# Altium PCB PCB1.PcbDoc (part 7 of 9)
Units mm, origin at the board's own origin, x right, y up, seen from the top; angles counter-clockwise.
Board outline 227 x 102 mm, 4 copper layers (Top Layer, MidLayer1, MidLayer2, Bottom Layer); 425 components, 426 nets, 1455 pads, 440 vias.
Unrouted connection lines stored in the file: 2.
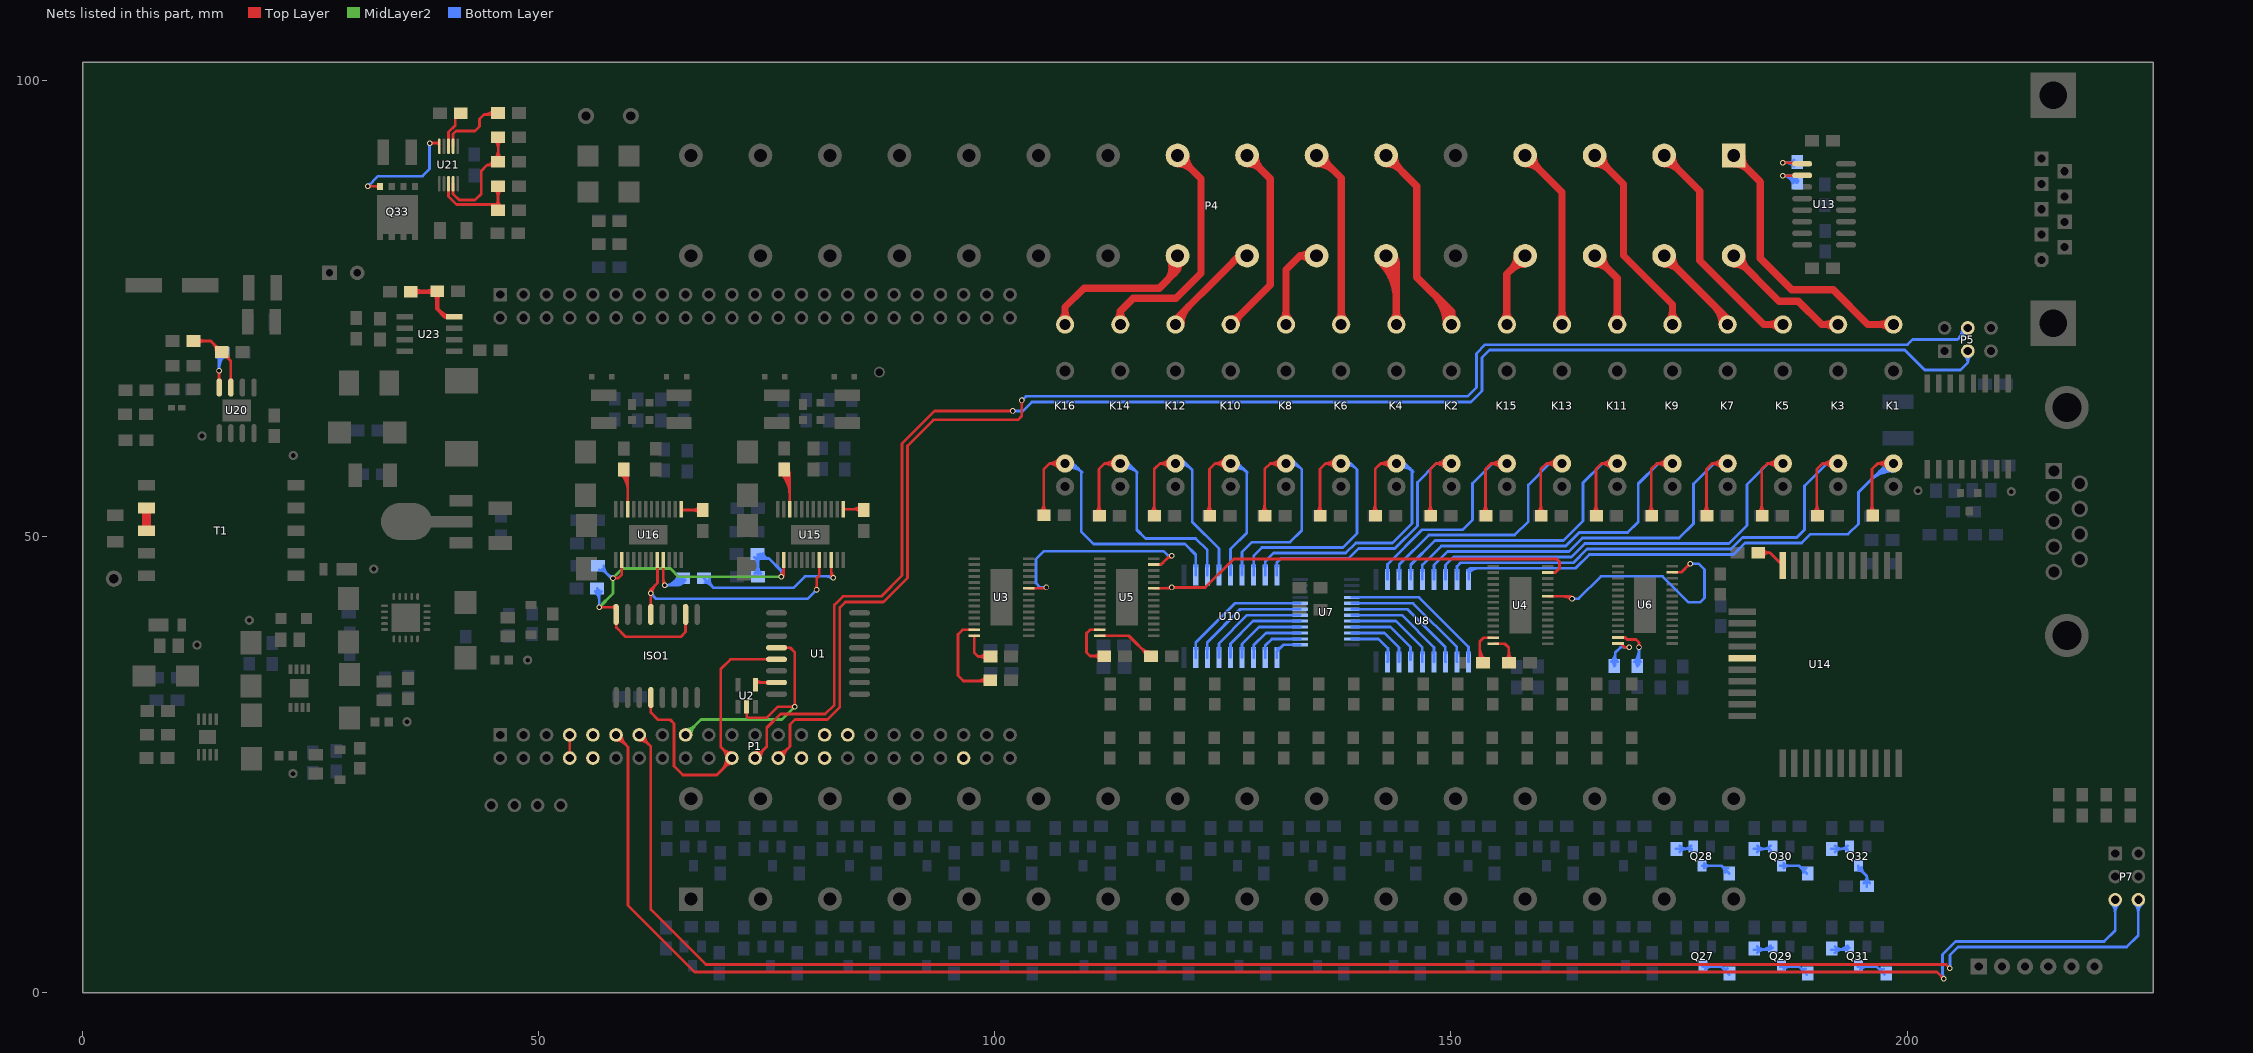
[diagram p9: the nets of this part, all layers, seen from the top]

## Via types
v1: diameter 0.6, hole 0.4, Top Layer to Bottom Layer, 427 vias
v2: diameter 0.5, hole 0.2, Top Layer to Bottom Layer, 9 vias
v3: diameter 0.66, hole 0.33, Top Layer to Bottom Layer, 4 vias

## Nets (pads, with @x,y where several pads share a name; then routed paths per layer and width w, separated by ;. In a path a pad name is that pad's centre, name@x,y a point inside that pad or via, vN(x,y) a via of type N, cw(c..) or ccw(c..) an arc to the next point about the centre after c; other vN are vias at no path point) (continued)
NetQ27_3: Q27.3 R99.1 | length 5.6
  Bottom Layer w0.3: Q27.3@177.571,2.897 179.634,2.897 R99.1@180.491,2.04 ; Q27.3@177.857,2.589 cw(c178.6,1.847) 178.6,2.897 ; Q27.3@177.857,3.084 ccw(c178.31,3.537) 178.31,2.897 ; 179.762,2.769 ccw(c180.089,3.096) R99.1@180.304,2.686 ; 179.883,2.647 cw(c179.493,2.257) R99.1@180.045,2.257
NetQ28_1: Q28.1 R92.2 | length 4.9
  Bottom Layer w0.3: R92.2@174.671,15.804 Q28.1@176.389,15.804 ; R92.2@175.066,15.461 cw(c175.894,14.633) 175.894,15.804 cw(c175.894,16.975) R92.2@175.066,16.147 ; 175.491,15.804 ccw(c175.491,16.966) Q28.1@176.313,16.144 ; 175.939,15.804 cw(c175.939,15.276) Q28.1@176.313,15.649
NetQ28_3: Q28.3 R100.1 | length 6
  Bottom Layer w0.3: Q28.3@177.581,13.947 179.645,13.947 R100.1@180.501,13.09 ; Q28.3@177.757,13.699 cw(c178.355,13.102) 178.355,13.947 cw(c178.355,14.792) Q28.3@177.757,14.194 ; 179.712,13.879 ccw(c180.223,14.39) R100.1@180.395,13.688 ; 179.778,13.813 cw(c179.182,13.217) R100.1@180.025,13.217
NetQ29_1: Q29.1 R93.2 | length 5.3
  Bottom Layer w0.3: R93.2@183.175,4.754 Q29.1@184.893,4.754 ; R93.2@183.574,4.404 cw(c184.418,3.559) 184.418,4.754 ; R93.2@183.574,5.09 ccw(c184.385,5.901) 184.385,4.754 ; 183.984,4.754 ccw(c183.984,6.223) Q29.1@185.023,5.184 ; 184.708,4.754 ccw(c184.708,5.499) Q29.1@185.235,4.972
NetQ29_3: Q29.3 R101.1 | length 5.5
  Bottom Layer w0.3: Q29.3@186.085,2.897 188.149,2.897 R101.1@189.005,2.04 ; Q29.3@186.467,2.589 cw(c187.21,1.847) 187.21,2.897 ; Q29.3@186.467,3.084 ccw(c186.92,3.537) 186.92,2.897 ; 188.309,2.736 ccw(c188.625,3.051) R101.1@188.857,2.671 ; R101.1@188.51,2.536 cw(c188.231,2.257) R101.1@188.625,2.257
NetQ30_1: Q30.1 R94.2 | length 4.9
  Bottom Layer w0.3: R94.2@183.181,15.804 Q30.1@184.898,15.804 ; R94.2@183.58,15.461 cw(c184.408,14.633) 184.408,15.804 cw(c184.408,16.975) R94.2@183.58,16.147 ; 184.201,15.804 ccw(c184.201,16.966) Q30.1@185.023,16.144 ; 184.649,15.804 cw(c184.649,15.276) Q30.1@185.023,15.649
NetQ30_3: Q30.3 R102.1 | length 5.8
  Bottom Layer w0.3: Q30.3@186.091,13.947 188.154,13.947 R102.1@189.011,13.09 ; Q30.3@186.467,13.699 cw(c187.065,13.102) 187.065,13.947 cw(c187.065,14.792) Q30.3@186.467,14.194 ; 188.267,13.834 ccw(c188.736,14.303) R102.1@188.952,13.676 ; 188.442,13.659 cw(c188.001,13.217) R102.1@188.625,13.217
NetQ31_1: Q31.1 R95.2 | length 5.3
  Bottom Layer w0.3: R95.2@191.69,4.754 Q31.1@193.407,4.754 ; R95.2@192.093,4.404 cw(c192.938,3.559) 192.938,4.754 ; R95.2@192.093,5.09 ccw(c192.904,5.901) 192.904,4.754 ; 192.414,4.754 ccw(c192.414,6.223) Q31.1@193.453,5.184 ; 193.138,4.754 ccw(c193.138,5.499) Q31.1@193.665,4.972
NetQ31_3: Q31.3 R103.1 | length 5.2
  Bottom Layer w0.3: Q31.3@194.6,2.897 196.663,2.897 R103.1@197.52,2.04 ; Q31.3@194.897,2.589 cw(c195.64,1.847) 195.64,2.897 ; Q31.3@194.897,3.084 ccw(c195.35,3.537) 195.35,2.897 ; 196.872,2.688 ccw(c197.176,2.992) R103.1@197.431,2.647
NetQ32_1: Q32.1 R96.2 | length 4.9
  Bottom Layer w0.3: R96.2@191.69,15.804 Q32.1@193.407,15.804 ; R96.2@192.093,15.461 cw(c192.921,14.633) 192.921,15.804 cw(c192.921,16.975) R96.2@192.093,16.147 ; 192.631,15.804 ccw(c192.631,16.966) Q32.1@193.453,16.144 ; 193.079,15.804 cw(c193.079,15.276) Q32.1@193.453,15.649
NetQ32_3: Q32.3 R104.1 | length 5.7
  Bottom Layer w0.3: Q32.3@194.65,13.447 cw(c194.65,12.763) 195.133,13.247 ; Q32.3@194.65,13.947 194.65,13.73 195.58,12.8 ; Q32.3@195,13.797 ccw(c196.006,13.797) 195.295,13.085 ; R104.1@195.248,12.034 ccw(c194.529,12.8) 195.58,12.8 ; R104.1@195.58,11.68 195.58,12.8 ; R104.1@195.912,12.034 cw(c196.631,12.8) 195.58,12.8
NetQ33_4: Q33.4 U21.10 | length 16.1
  Top Layer w0.3: v1(31.27,88.42) 32.589,88.42 Q33.4@32.613,88.396 ; v1@31.376,88.314 cw(c31.632,88.058) 31.632,88.42 cw(c31.632,88.782) v1@31.376,88.526 ; 32.127,88.42 ccw(c32.127,88.92) Q33.4@32.48,88.566 ; 32.193,88.42 cw(c32.193,88.014) Q33.4@32.48,88.301 ; v1(38.04,93.16) 38.88,93.16 ; v1@38.146,93.054 cw(c38.402,92.798) 38.402,93.16 cw(c38.402,93.522) v1@38.146,93.266 ; U21.10@39.07,92.97 38.88,93.16 ; U21.10@39.07,93.35 38.88,93.16
  Bottom Layer w0.3: v1(31.27,88.42) 32.39,89.54 37.26,89.54 38.04,90.32 v1(38.04,93.16) ; v1@31.27,88.57 ccw(c31.27,88.932) 31.526,88.676 ccw(c31.782,88.42) v1@31.42,88.42 ; v1@37.934,93.054 cw(c37.678,92.798) 38.04,92.798 cw(c38.402,92.798) v1@38.146,93.054
NetR1_2: R1.2 U3.14 | length 5.6
  Top Layer w0.3: U3.14@97.758,39.155 97.73,39.127 97.73,37.31 98.16,36.88 R1.2@99.504,36.88 ; R1.2@99.034,36.537 ccw(c98.206,35.709) 98.206,36.88 ccw(c98.206,38.051) R1.2@99.034,37.223
NetR2_2: R2.2 U4.14 | length 5.4
  Top Layer w0.3: U4.14@154.648,38.285 155.895,38.285 156.34,37.84 156.34,36.224 R2.2@156.364,36.2 ; R2.2@156.021,36.543 ccw(c155.251,37.313) 156.34,37.313 ; 156.34,37.429 ccw(c157.593,37.429) R2.2@156.707,36.543
NetR3_2: R3.2 U3.13 | length 12.2
  Top Layer w0.3: U3.13@97.758,39.805 96.445,39.805 95.95,39.31 95.95,34.81 96.55,34.21 99.33,34.21 R3.2@99.47,34.07 ; 98.027,34.21 ccw(c98.027,35.62) R3.2@99.024,34.623 ; 98.365,34.21 cw(c98.365,33.278) R3.2@99.024,33.937
NetR4_2: R4.2 U4.13 | length 7
  Top Layer w0.3: R4.2@153.046,36.543 ccw(c152.795,36.794) R4.2@153.15,36.794 ; 153.15,37.224 ccw(c154.413,37.224) R4.2@153.52,36.331 ; 153.15,37.948 ccw(c155.137,37.948) R4.2@153.732,36.543 ; R4.2@153.516,36.2 153.15,36.566 153.15,38.55 153.535,38.935 U4.13@154.648,38.935
NetR5_2: R5.2 U5.14 | length 8.4
  Top Layer w0.3: U5.14@111.498,39.155 114.675,39.155 116.9,36.93 R5.2@117.104,36.93 ; 116.018,37.812 ccw(c116.977,38.772) R5.2@116.977,37.415 ; 116.204,37.626 cw(c115.507,36.93) R5.2@116.492,36.93
NetR6_2: R6.2 U6.14 | length 8.6
  Top Layer w0.3: U6.14@168.308,38.315 168.605,38.315 169.03,37.89 v1(169.56,37.89) ; U6.14@168.793,38.315 ccw(c169.247,38.315) 168.926,37.994 ; v1@169.454,37.784 ccw(c169.198,37.528) 169.198,37.89 ccw(c169.198,38.252) v1@169.454,37.996
  Bottom Layer w0.3: R6.2@167.568,36.317 ccw(c166.606,37.34) 168.01,37.34 ; R6.2@167.773,36.099 ccw(c167.258,36.646) 168.01,36.646 ; R6.2@167.9,35.837 168.01,35.947 168.01,37.34 ; 168.01,36.869 ccw(c168.805,36.869) R6.2@168.243,36.307 ; v1@169.454,37.784 ccw(c169.198,37.528) 169.198,37.89 ccw(c169.198,38.252) v1@169.454,37.996 ; v1(169.56,37.89) 168.56,37.89 168.01,37.34
NetR7_2: R7.2 U5.13 | length 7.7
  Top Layer w0.3: 110.648,36.94 cw(c110.648,35.701) R7.2@111.524,36.577 ; 110.744,36.94 ccw(c110.744,38.043) R7.2@111.524,37.263 ; U5.13@111.498,39.805 110.415,39.805 110.04,39.43 110.04,37.33 110.43,36.94 111.974,36.94 R7.2@111.994,36.92
NetR8_2: R8.2 U6.13 | length 9.5
  Top Layer w0.3: U6.13@168.308,38.965 169.088,38.965 169.303,38.75 170.27,38.75 170.61,38.41 v1(170.61,37.9) ; U6.13@168.791,38.963 cw(c168.869,38.449) 169.237,38.816 ; v1@170.504,38.006 ccw(c170.248,38.262) 170.61,38.262 ccw(c170.972,38.262) v1@170.716,38.006
  Bottom Layer w0.3: R8.2@170.088,36.307 ccw(c168.828,37.567) 170.61,37.567 ; R8.2@170.3,36.095 ccw(c169.552,36.843) 170.61,36.843 ; R8.2@170.431,35.837 170.61,36.016 v1(170.61,37.9) ; v1@170.504,37.794 cw(c170.248,37.538) 170.61,37.538 cw(c170.972,37.538) v1@170.716,37.794 ; 170.61,36.703 ccw(c171.17,36.703) R8.2@170.774,36.307
NetR123_1: R123.1 U13.10 | length 10.6
  Top Layer w0.3: v1(186.37,89.58) 188.457,89.58 U13.10@188.5,89.623 ; v1@186.476,89.474 cw(c186.732,89.218) 186.732,89.58 cw(c186.732,89.942) v1@186.476,89.686 ; 187.234,89.58 ccw(c187.234,90.089) U13.10@187.594,89.729
  Bottom Layer w0.3: v1@186.476,89.474 cw(c186.732,89.218) 186.732,89.58 cw(c186.732,89.942) v1@186.476,89.686 ; 186.788,89.58 cw(c186.788,88.549) R123.1@187.765,88.878 ; 187.205,89.58 cw(c187.205,88.69) R123.1@188.049,88.974 ; R123.1@187.455,88.954 ccw(c186.697,88.98) 187.234,89.516 ccw(c187.602,89.885) R123.1@187.777,89.394 ; R123.1@187.48,88.782 ccw(c186.37,88.409) v1(186.37,89.58) 187.17,89.58 R123.1@187.94,88.81
NetR123_2: R123.2 U13.9 | length 7.4
  Top Layer w0.3: v1(186.37,91.02) 188.373,91.02 U13.9@188.5,90.893 ; v1@186.476,90.914 cw(c186.732,90.658) 186.732,91.02 cw(c186.732,91.382) v1@186.476,91.126 ; 187.031,91.02 cw(c187.031,90.224) U13.9@187.594,90.787
  Bottom Layer w0.3: v1(186.37,91.02) 187.864,91.02 R123.2@187.94,91.096 ; v1@186.476,90.914 cw(c186.732,90.658) 186.732,91.02 cw(c186.732,91.382) v1@186.476,91.126 ; v1@186.646,91.02 cw(c186.646,89.675) R123.2@187.597,90.626 ; 186.892,91.02 ccw(c186.892,92.017) R123.2@187.597,91.312
NetR128_1: R128.1 U14.11 | length 5.1
  Top Layer w0.3: R128.1@183.68,48.26 184.974,48.26 ; R128.1@184.151,47.918 cw(c184.974,47.099) 184.974,48.26 ; R128.1@184.151,48.602 ccw(c184.974,49.421) 184.974,48.26 ; U14.11@186.37,46.864 184.974,48.26
NetR129_1: R129.1 U15.22 | length 10.5
  Top Layer w0.3: R129.1@76.577,56.92 cw(c74.314,54.657) 77.514,54.657 ; R129.1@76.789,57.132 cw(c75.039,55.382) 77.514,55.382 ; R129.1@77.001,57.344 cw(c75.763,56.106) 77.514,56.106 ; R129.1@77.213,57.556 cw(c76.487,56.83) R129.1@77.514,56.83 ; R129.1@77.46,56.86 77.514,56.806 U15.22@77.514,53.026
NetR132_2: R132.2 U15.13 | length 4.1
  Top Layer w0.3: U15.13@83.366,53.026 85.52,53.026 R132.2@85.61,52.936 ; 84.351,53.026 ccw(c84.351,54.322) R132.2@85.267,53.406 ; 84.528,53.026 cw(c84.528,51.981) R132.2@85.267,52.72
NetR134_1: R134.1 U16.22 | length 9.1
  Top Layer w0.3: R134.1@58.987,56.93 cw(c57.111,55.054) 59.764,55.054 ; R134.1@59.199,57.142 cw(c57.835,55.778) 59.764,55.778 ; R134.1@59.33,57.4 59.764,56.966 U16.22@59.764,53.026 ; R134.1@59.411,57.354 cw(c58.559,56.502) 59.764,56.502
NetR136_2: R136.2 U16.13 | length 4.6
  Top Layer w0.3: U16.13@65.616,53.026 65.707,52.936 R136.2@67.99,52.936 ; U16.13@65.645,53.055 ccw(c65.932,53.342) 65.932,52.936 ; R136.2@67.647,52.593 ccw(c66.819,51.765) 66.819,52.936 ccw(c66.819,54.107) R136.2@67.647,53.279
NetR145_2: R145.2 U20.4 | length 8.4
  Top Layer w0.3: v1@14.854,68.084 cw(c14.598,67.828) 14.96,67.828 cw(c15.322,67.828) v1@15.066,68.084 ; U20.4@14.879,67.166 ccw(c14.683,67.362) 14.96,67.362 ; 14.96,67.482 ccw(c15.407,67.482) U20.4@15.091,67.166 ; v1(14.96,68.19) 14.96,66.385 U20.4@14.985,66.36
  Bottom Layer w0.3: v1@14.854,68.296 ccw(c14.598,68.552) 14.96,68.552 ccw(c15.322,68.552) v1@15.066,68.296 ; v1(14.96,68.19) 14.96,70.4 R145.2@14.99,70.43 ; v1@14.96,68.409 cw(c17.008,68.409) R145.2@15.56,69.857 ; 14.96,69.133 cw(c16.284,69.133) R145.2@15.348,70.069
NetR146_1: R146.1 R148.2 U20.3 | length 14.4
  Top Layer w0.3: R148.2@12.146,71.47 14.05,71.47 16.255,69.265 U20.3@16.255,66.36 ; R148.2@12.616,71.127 cw(c13.444,70.299) 13.444,71.47 cw(c13.444,72.641) R148.2@12.616,71.813 ; 14.215,71.305 cw(c13.171,70.26) R146.1@14.648,70.26 ; 14.522,70.998 ccw(c15.133,71.609) R146.1@15.133,70.745 ; R146.1@14.727,70.793 cw(c14.195,70.26) R146.1@14.948,70.26 ; R146.1@15.387,69.775 cw(c15.387,68.911) 15.998,69.522 ; R146.1@15.87,70.216 ccw(c16.978,70.116) 16.191,69.329 ; U20.3@16.149,67.166 ccw(c15.893,67.422) 16.255,67.422 ccw(c16.617,67.422) U20.3@16.361,67.166
NetR150_1: R150.1 R153.2 U21.4 | length 17.5
  Top Layer w0.3: U21.4@40.614,88.71 40.614,87.596 41.29,86.92 43.02,86.92 43.7,87.6 43.7,90.12 44.32,90.74 ; 44.704,90.74 ccw(c44.704,91.3) R150.1@45.247,91.165 ; R150.1@44.956,91.237 cw(c44.32,91.396) 44.32,90.74 ; R153.2@45.205,93.477 cw(c44.363,92.635) 45.554,92.635 ; R150.1@45.211,91.463 ccw(c44.383,92.291) 45.554,92.291 ccw(c46.725,92.291) R150.1@45.897,91.463 ; R153.2@45.548,93.82 45.554,93.814 R150.1@45.554,91.12 45.174,90.74 44.32,90.74 ; 45.554,92.664 cw(c46.704,92.664) R153.2@45.891,93.477
NetR151_1: R151.1 R154.2 U21.3 | length 13.4
  Top Layer w0.3: U21.3@40.114,88.71 40.114,87.316 41.01,86.42 R154.2@45.47,86.42 ; R154.2@45.195,86.153 ccw(c44.367,86.981) 45.538,86.981 ccw(c46.709,86.981) R154.2@45.881,86.153 ; R151.1@45.211,88.097 cw(c44.422,87.308) 45.538,87.308 ; R154.2@45.538,85.81 45.538,88.424 R151.1@45.554,88.44 ; 45.538,87.23 cw(c46.764,87.23) R151.1@45.897,88.097
NetR152_2: R152.2 U21.8 | length 4
  Top Layer w0.3: U21.8@40.114,92.81 40.114,94.374 40.85,95.11 R152.2@40.85,96.46
NetR155_2: R155.2 U21.7 | length 10
  Top Layer w0.3: U21.7@40.614,92.81 40.614,94.154 40.94,94.48 43.02,94.48 43.52,94.98 43.52,95.79 44.02,96.29 ; 44.661,96.29 cw(c44.661,95.7) R155.2@45.078,96.117 ; 44.662,96.29 ccw(c44.662,97.094) R155.2@45.279,96.579 ; R155.2@45.049,96.771 cw(c44.02,97.631) 44.02,96.29 ; R155.2@45.548,96.46 45.378,96.29 44.02,96.29
NetR156_1: R156.1 R157.1 U23.4 | length 12.2
  Top Layer w0.5: R157.1@35.98,76.88 R156.1@38.86,76.88 ; R157.1@36.379,76.608 cw(c37.036,75.951) 37.036,76.88 cw(c37.036,77.809) R157.1@36.379,77.152 ; 37.775,76.88 ccw(c37.775,77.878) R156.1@38.481,77.172 ; 37.872,76.88 cw(c37.872,76.019) R156.1@38.481,76.628 ; R156.1@38.608,76.628 cw(c37.999,76.019) 38.86,76.019 ; 38.86,75.922 cw(c39.858,75.922) R156.1@39.152,76.628 ; R156.1@38.88,76.9 R156.1@38.86,76.88 ; 39.407,74.483 ccw(c40.13,75.207) U23.4@40.13,74.184 ; U23.4@40.73,74.134 39.756,74.134 38.86,75.03 R156.1@38.86,76.88
NetT1_8: T1.8 T1.9 | length 2.5
  Top Layer w1: T1.8@7.03,50.68 T1.9@7.03,53.16
NetU1_7: U1.7 U2.4 | length 3.7
  Top Layer w0.3: U2.4@73.75,33.764 74.021,34.035 U1.7@76.07,34.035 ; U2.4@73.841,34.313 ccw(c74.511,34.982) 74.511,34.035 ; U1.7@75.114,33.929 ccw(c74.858,33.673) 74.858,34.035 ccw(c74.858,34.397) U1.7@75.114,34.141
NetU3_23: U3.23 U5.27 | length 26.7
  Top Layer w0.3: U3.23@103.702,44.355 105.565,44.355 v1(105.66,44.45) ; 105.069,44.355 ccw(c105.069,45.041) v1@105.554,44.556 ; U5.27@117.442,46.955 118.227,46.955 119.211,47.94 v1(119.4,47.94) ; U5.27@117.924,46.957 ccw(c117.924,47.693) 118.444,47.173 ; 118.822,47.551 cw(c119.4,46.973) v1@119.4,47.79
  Bottom Layer w0.3: v1@105.554,44.344 ccw(c105.298,44.088) 105.298,44.45 ccw(c105.298,44.812) v1@105.554,44.556 ; v1(105.66,44.45) 104.97,44.45 104.5,44.92 104.5,47.56 105.37,48.43 118.48,48.43 118.97,47.94 v1(119.4,47.94) ; v1@119.294,47.834 ccw(c119.038,47.578) 119.038,47.94 ccw(c119.038,48.302) v1@119.294,48.046
NetU4_23: U4.23 U6.27 | length 30.2
  Top Layer w0.3: U4.23@160.592,43.485 163.005,43.485 v1(163.27,43.22) ; 162.268,43.485 cw(c162.268,42.218) v1@163.164,43.114 ; 162.992,43.485 cw(c162.992,42.942) v1@163.376,43.326 ; U6.27@174.252,46.115 175.262,46.115 v1(176.21,47.063) v1@176.163,47.11 ; v1@176.06,47.063 cw(c175.698,47.063) 175.954,46.807 cw(c176.21,46.551) v1@176.21,46.913
  Bottom Layer w0.3: v1(163.27,43.22) 163.98,43.22 166.43,45.67 173.19,45.67 176.04,42.82 177.3,42.82 177.78,43.3 177.78,46.42 177.137,47.063 v1(176.21,47.063) ; v1@163.376,43.114 cw(c163.632,42.858) 163.632,43.22 cw(c163.632,43.582) v1@163.376,43.326 ; v1@176.316,46.957 cw(c176.572,46.701) 176.572,47.063 cw(c176.572,47.425) v1@176.316,47.169
NetU4_27: U4.27 U5.23 | length 49.2
  Top Layer w0.3: U5.23@117.442,44.355 119.305,44.355 v1(119.4,44.45) 123.06,44.45 126.19,47.58 161.59,47.58 161.903,47.267 161.903,46.56 161.428,46.085 U4.27@160.592,46.085 ; 118.809,44.355 ccw(c118.809,45.041) v1@119.294,44.556 ; v1@119.506,44.344 cw(c119.762,44.088) 119.762,44.45 cw(c119.762,44.812) v1@119.506,44.556
O5V_ISO: C35.1 C36.1 C49.1 C50.1 ISO1.10 ISO1.16 U15.2 U16.2 | length 68.2
  Top Layer w0.3: v1(56.64,42.28) 58.16,42.28 ; v1@56.746,42.174 cw(c57.002,41.918) 57.002,42.28 cw(c57.002,42.642) v1@56.746,42.386 ; 57.978,42.28 ccw(c57.978,42.847) ISO1.16@58.379,42.446 ; v1(58.14,45.48) 58.74,45.48 59.112,45.852 U16.2@59.112,47.464 ; v1@58.246,45.374 cw(c58.502,45.118) 58.502,45.48 cw(c58.502,45.842) v1@58.246,45.586 ; ISO1.16@58.348,42.402 cw(c58.16,42.486) 58.16,42.28 ; ISO1.16@58.379,40.534 cw(c58.063,40.218) 58.51,40.218 ; ISO1.16@58.485,41.49 58.51,41.465 58.51,40.05 59.51,39.05 65.59,39.05 66.105,39.565 ISO1.10@66.105,41.49 ; 58.51,40.338 cw(c58.787,40.338) ISO1.16@58.591,40.534 ; ISO1.16@58.59,41.85 58.16,42.28 ; ISO1.10@65.999,40.534 cw(c65.743,40.278) 66.105,40.278 cw(c66.467,40.278) ISO1.10@66.211,40.534 ; v1@76.484,45.726 ccw(c75.572,46.638) U15.2@76.862,46.638 ; v1(76.59,45.62) 76.862,45.892 U15.2@76.862,47.464 ; v1@76.696,45.514 ccw(c76.297,45.913) 76.862,45.913
  MidLayer2 w0.3: v1(56.64,42.28) 58.14,43.78 v1(58.14,45.48) 59.181,46.521 64.443,46.521 65.344,45.62 v1(76.59,45.62)
  Bottom Layer w0.3: C49.1@56.194,43.997 cw(c55.117,42.92) 56.64,42.92 ; C49.1@56.406,44.209 cw(c55.842,43.645) 56.64,43.645 ; C49.1@56.41,44.34 56.64,44.11 v1(56.64,42.28) ; v1@56.534,42.386 ccw(c56.278,42.642) 56.64,42.642 ccw(c57.002,42.642) v1@56.746,42.386 ; C50.1@56.637,46.355 cw(c56.637,45.298) 57.385,46.045 ; 56.64,43.418 cw(c57.459,43.418) C49.1@56.88,43.997 ; C50.1@56.99,46.44 57.95,45.48 v1(58.14,45.48) ; C50.1@57.122,46.84 ccw(c58.406,46.84) 57.498,45.932 ; 57.56,45.87 ccw(c58.14,46.451) v1@58.14,45.63 ; C36.1@73.647,47.775 cw(c72.723,46.85) 74.03,46.85 ; C35.1@73.687,45.983 ccw(c72.859,46.811) 74.03,46.811 ccw(c75.201,46.811) C35.1@74.373,45.983 ; C36.1@74.003,48.101 ccw(c74.547,48.18) C36.1@74.547,47.63 ; C35.1@74.03,45.64 74.03,47.93 74.09,47.99 74.45,47.63 75.24,47.63 ; 74.03,47.044 cw(c75.064,47.044) C36.1@74.333,47.775 ; C36.1@74.3,48.144 ccw(c74.894,48.23) 74.894,47.63 ; C36.1@74.597,48.187 ccw(c75.24,48.28) 75.24,47.63 ; v1@76.484,45.726 ccw(c76.228,45.982) 76.59,45.982 ccw(c76.952,45.982) v1@76.696,45.726 ; v1(76.59,45.62) 76.59,46.28 75.24,47.63
OUT_PIN0: K1.1 P4.1 | length 35.8
  Top Layer w0.8: P4.1@180.987,90.91 cw(c180.987,88.737) 182.523,90.274 cw(c184.06,91.81) P4.1@181.887,91.81 ; P4.1@180.987,91.81 183.89,88.907 183.89,80.55 187.36,77.08 191.9,77.08 195.7,73.28 K1.1@198.49,73.28 ; K1.1@198.066,72.856 ccw(c197.041,71.831) 197.041,73.28 ccw(c197.041,74.729) K1.1@198.066,73.704
OUT_PIN1: K3.1 P4.2 | length 20.3
  Top Layer w0.8: P4.2@180.987,79.91 cw(c180.987,77.737) 182.523,79.274 cw(c184.06,80.81) P4.2@181.887,80.81 ; P4.2@180.987,80.81 185.957,75.84 188.08,75.84 190.64,73.28 K3.1@192.437,73.28 ; K3.1@192.013,72.856 ccw(c190.989,71.831) 190.989,73.28 ccw(c190.989,74.729) K3.1@192.013,73.704
OUT_PIN2: K5.1 P4.3 | length 30.8
  Top Layer w0.8: P4.3@173.367,90.91 cw(c173.367,88.737) 174.903,90.274 cw(c176.44,91.81) P4.3@174.267,91.81 ; P4.3@173.367,91.81 177.26,87.917 177.26,80.29 184.27,73.28 K5.1@186.385,73.28 ; K5.1@185.96,72.856 ccw(c184.936,71.831) 184.936,73.28 ccw(c184.936,74.729) K5.1@185.96,73.704
OUT_PIN3: K7.1 P4.4 | length 16
  Top Layer w0.8: P4.4@173.367,79.91 cw(c173.367,77.737) 174.903,79.274 cw(c176.44,80.81) P4.4@174.267,80.81 ; P4.4@173.367,80.81 180.332,73.845 K7.1@180.332,73.28 ; 178.908,75.269 cw(c176.919,73.28) K7.1@179.732,73.28
OUT_PIN4: K9.1 P4.5 | length 27.8
  Top Layer w0.8: P4.5@165.747,90.91 cw(c165.747,88.737) 167.283,90.274 cw(c168.82,91.81) P4.5@166.647,91.81 ; P4.5@165.747,91.81 168.92,88.637 168.92,80.83 174.279,75.471 K9.1@174.279,73.28 ; K9.1@173.855,73.704 ccw(c172.831,74.729) 174.279,74.729 ccw(c175.728,74.729) K9.1@174.704,73.704
OUT_PIN5: K11.1 P4.6 | length 14.2
  Top Layer w0.8: P4.6@165.747,79.91 cw(c165.747,77.737) 167.283,79.274 cw(c168.82,80.81) P4.6@166.647,80.81 ; P4.6@165.747,80.81 168.227,78.33 K11.1@168.227,73.28 ; K11.1@167.802,73.704 ccw(c166.778,74.729) 168.227,74.729 ccw(c169.675,74.729) K11.1@168.651,73.704
OUT_PIN6: K13.1 P4.7 | length 25.9
  Top Layer w0.8: P4.7@158.127,90.91 cw(c158.127,88.737) 159.663,90.274 cw(c161.2,91.81) P4.7@159.027,91.81 ; P4.7@158.127,91.81 162.174,87.763 K13.1@162.174,73.28 ; K13.1@161.75,73.704 ccw(c160.725,74.729) 162.174,74.729 ccw(c163.623,74.729) K13.1@162.598,73.704
OUT_PIN7: K15.1 P4.8 | length 14
  Top Layer w0.8: K15.1@155.697,73.704 ccw(c154.673,74.729) 156.121,74.729 ccw(c157.57,74.729) K15.1@156.546,73.704 ; K15.1@156.121,73.28 156.121,78.804 P4.8@158.127,80.81 ; P4.8@157.227,80.81 cw(c155.054,80.81) 156.591,79.274 cw(c158.127,77.737) P4.8@158.127,79.91
OUT_PIN8: K2.1 P4.11 | length 33
  Top Layer w0.8: P4.11@142.887,90.91 cw(c142.887,88.737) 144.423,90.274 cw(c145.96,91.81) P4.11@143.787,91.81 ; P4.11@142.887,91.81 146.26,88.437 146.26,78.47 150.069,74.661 ; 148.068,76.662 cw(c144.685,73.28) K2.1@149.469,73.28 ; 149.433,75.297 cw(c147.417,73.28) K2.1@150.269,73.28 ; K2.1@149.659,73.719 ccw(c148.779,74.661) 150.069,74.661 ; K2.1@150.069,73.28 150.069,74.661 ; K2.1@150.478,73.719 cw(c151.359,74.661) 150.069,74.661
OUT_PIN9: K4.1 P4.12 | length 19.9
  Top Layer w0.8: P4.12@142.251,80.174 cw(c137.989,75.912) 144.016,75.912 ; P4.12@142.816,80.739 cw(c139.92,77.843) 144.016,77.843 ; P4.12@142.887,80.81 144.016,79.681 K4.1@144.016,73.28 ; P4.12@143.382,81.305 cw(c141.851,79.774) 144.016,79.774 ; K4.1@143.592,73.704 ccw(c142.567,74.729) 144.016,74.729 ccw(c145.465,74.729) K4.1@144.44,73.704
OUT_PIN10: K6.1 P4.13 | length 25.6
  Top Layer w0.8: P4.13@135.25,92.04 137.963,89.327 K6.1@137.963,73.28 ; P4.13@135.267,90.91 cw(c135.267,88.223) 137.167,90.123 ; P4.13@136.167,91.81 ccw(c137.826,91.81) 136.653,90.637 ; K6.1@137.539,73.704 ccw(c136.515,74.729) 137.963,74.729 ccw(c139.412,74.729) K6.1@138.388,73.704
OUT_PIN11: K8.1 P4.14 | length 14.8
  Top Layer w0.8: K8.1@131.486,73.704 ccw(c130.462,74.729) 131.911,74.729 ccw(c133.359,74.729) K8.1@132.335,73.704 ; K8.1@131.911,73.28 131.911,79.281 133.44,80.81 ; P4.14@134.553,80.262 ccw(c133.44,79.406) 133.44,80.81 ; P4.14@134.553,81.358 cw(c133.44,82.214) 133.44,80.81 ; P4.14@135.267,80.81 133.44,80.81
OUT_PIN12: K10.1 P4.15 | length 27.1
  Top Layer w0.8: K10.1@125.858,73.28 130.19,77.612 130.19,89.267 P4.15@127.647,91.81 ; K10.1@125.858,73.88 ccw(c125.858,75.329) 126.882,74.304 ccw(c127.907,73.28) K10.1@126.458,73.28 ; P4.15@127.647,90.91 cw(c127.647,88.737) 129.183,90.274 cw(c130.72,91.81) P4.15@128.547,91.81
OUT_PIN13: K12.1 P4.16 | length 15.1
  Top Layer w0.8: K12.1@119.805,73.28 119.805,73.825 125.35,79.37 126.79,80.81 P4.16@127.647,80.81 ; K12.1@120.405,73.28 cw(c123.17,73.28) 121.215,75.235 ; 126.142,80.162 cw(c127.482,78.822) P4.16@127.639,80.71
OUT_PIN14: K14.1 P4.17 | length 31.7
  Top Layer w0.8: K14.1@113.328,73.704 ccw(c112.304,74.729) 113.753,74.729 ccw(c115.201,74.729) K14.1@114.177,73.704 ; K14.1@113.753,73.28 113.753,74.743 115.17,76.16 119.86,76.16 122.6,78.9 122.6,89.237 P4.17@120.027,91.81 ; P4.17@120.027,90.91 cw(c120.027,88.737) 121.563,90.274 cw(c123.1,91.81) P4.17@120.927,91.81
OUT_PIN15: K16.1 P4.18 | length 26.3
  Top Layer w0.8: K16.1@107.276,73.704 ccw(c106.251,74.729) 107.7,74.729 ccw(c109.149,74.729) K16.1@108.124,73.704 ; K16.1@107.7,73.28 107.7,75.19 109.77,77.26 118.03,77.26 120.027,79.257 ; 118.807,78.037 ccw(c117.325,79.518) P4.18@119.215,80.422 ; P4.18@119.58,80.029 cw(c119.137,79.257) 120.027,79.257 ; 119.606,78.836 ccw(c118.407,80.035) P4.18@119.937,80.767 ; P4.18@120.027,80.81 120.027,79.257 ; P4.18@120.474,80.029 ccw(c120.917,79.257) 120.027,79.257
OUT_SIG0: D36.2 K1.3 U8.18 | length 77.9
  Top Layer w0.3: D36.2@195.825,52.68 ccw(c195.017,53.488) 196.16,53.488 ; D36.2@196.16,52.41 196.16,57.42 196.78,58.04 ; 196.16,53.528 ccw(c197.359,53.528) D36.2@196.511,52.68 ; K1.3@197.812,57.527 ccw(c196.78,56.745) 196.78,58.04 ; K1.3@197.812,58.553 cw(c196.78,59.335) 196.78,58.04 ; K1.3@198.052,57.708 ccw(c197.384,57.202) 197.384,58.04 ccw(c197.384,58.878) K1.3@198.052,58.372 ; K1.3@198.49,58.04 196.78,58.04
  Bottom Layer w0.3: U8.18@151.819,46.338 cw(c152.355,45.802) 152.355,46.56 ; U8.18@151.94,45.341 151.94,46.25 152.25,46.56 163.66,46.56 165.17,48.07 180.96,48.07 182.22,49.33 188.44,49.33 189.4,50.29 193.54,50.29 194.68,51.43 194.68,54.89 197.83,58.04 K1.3@198.49,58.04 ; U8.18@152.031,46.126 cw(c153.079,45.078) 153.079,46.56 ; 195.912,56.122 cw(c198.49,53.545) K1.3@198.49,57.19 ; 196.424,56.634 cw(c198.49,54.569) K1.3@198.49,57.49 ; 196.937,57.147 cw(c198.49,55.593) K1.3@198.49,57.79 ; 197.449,57.659 cw(c198.49,56.617) K1.3@198.49,58.09 ; 197.506,57.716 ccw(c197.181,58.04) K1.3@197.64,58.04
OUT_SIG1: D37.2 K3.3 U8.17 | length 65.7
  Top Layer w0.3: D37.2@189.77,52.67 ccw(c188.955,53.484) 190.107,53.484 ; D37.2@190.107,52.41 190.107,57.42 190.727,58.04 ; 190.107,53.511 ccw(c191.297,53.511) D37.2@190.456,52.67 ; K3.3@191.76,57.527 ccw(c190.727,56.745) 190.727,58.04 ; K3.3@191.76,58.553 cw(c190.727,59.335) 190.727,58.04 ; K3.3@191.999,57.708 ccw(c191.331,57.202) 191.331,58.04 ccw(c191.331,58.878) K3.3@191.999,58.372 ; K3.3@192.437,58.04 190.727,58.04
  Bottom Layer w0.3: U8.17@150.578,46.309 ccw(c150.358,46.53) 150.67,46.53 ccw(c150.982,46.53) U8.17@150.761,46.309 ; U8.17@150.67,45.341 150.67,46.77 151.06,47.16 163.41,47.16 164.92,48.67 180.71,48.67 181.972,49.932 187.902,49.932 188.75,50.78 188.75,55.59 191.2,58.04 ; K3.3@191.644,57.735 ccw(c191.2,57.565) 191.2,58.04 ; K3.3@191.644,58.345 cw(c191.2,58.515) 191.2,58.04 ; K3.3@192.437,58.04 191.2,58.04
OUT_SIG2: D39.2 K5.3 U8.16 | length 63.4
  Top Layer w0.3: D39.2@183.715,52.67 ccw(c182.894,53.491) 184.055,53.491 ; D39.2@184.055,52.41 184.055,57.42 184.675,58.04 ; 184.055,53.505 ccw(c185.235,53.505) D39.2@184.4,52.67 ; K5.3@185.707,57.527 ccw(c184.675,56.745) 184.675,58.04 ; K5.3@185.707,58.553 cw(c184.675,59.335) 184.675,58.04 ; K5.3@185.946,57.708 ccw(c185.278,57.202) 185.278,58.04 ccw(c185.278,58.878) K5.3@185.946,58.372 ; K5.3@186.385,58.04 184.675,58.04
  Bottom Layer w0.3: U8.16@149.308,46.309 ccw(c149.088,46.53) 149.4,46.53 ccw(c149.712,46.53) U8.16@149.491,46.309 ; U8.16@149.4,45.341 149.4,46.92 150.27,47.79 163.19,47.79 164.67,49.27 180.46,49.27 182.44,51.25 182.44,55.75 184.73,58.04 ; K5.3@185.694,57.545 ccw(c184.73,56.855) 184.73,58.04 ; K5.3@185.694,58.535 cw(c184.73,59.225) 184.73,58.04 ; K5.3@185.938,57.72 ccw(c185.314,57.273) 185.314,58.04 ccw(c185.314,58.807) K5.3@185.938,58.36 ; K5.3@186.385,58.04 184.73,58.04
OUT_SIG3: D41.2 K7.3 U8.15 | length 56.7
  Top Layer w0.3: D41.2@177.659,52.67 ccw(c176.832,53.497) 178.002,53.497 ; D41.2@178.002,52.41 178.002,57.42 178.622,58.04 ; 178.002,53.498 ccw(c179.174,53.498) D41.2@178.345,52.67 ; K7.3@179.654,57.527 ccw(c178.622,56.745) 178.622,58.04 ; K7.3@179.654,58.553 cw(c178.622,59.335) 178.622,58.04 ; K7.3@179.894,57.708 ccw(c179.226,57.202) 179.226,58.04 ccw(c179.226,58.878) K7.3@179.894,58.372 ; K7.3@180.332,58.04 178.622,58.04
  Bottom Layer w0.3: U8.15@148.038,46.309 ccw(c147.818,46.53) 148.13,46.53 ccw(c148.442,46.53) U8.15@148.221,46.309 ; U8.15@148.13,45.341 148.13,46.9 149.62,48.39 162.92,48.39 164.4,49.87 175.01,49.87 176.58,51.44 176.58,55.81 178.81,58.04 ; K7.3@179.608,57.594 ccw(c178.81,57.102) 178.81,58.04 ; K7.3@179.608,58.486 cw(c178.81,58.978) 178.81,58.04 ; K7.3@180.332,58.04 178.81,58.04
OUT_SIG4: D43.2 K9.3 U8.14 | length 51.8
  Top Layer w0.3: D43.2@171.604,52.67 ccw(c170.77,53.504) 171.949,53.504 ; D43.2@171.949,52.41 171.949,57.42 172.569,58.04 K9.3@174.279,58.04 ; 171.949,53.492 ccw(c173.112,53.492) D43.2@172.29,52.67 ; K9.3@173.602,57.527 ccw(c172.569,56.745) 172.569,58.04 ccw(c172.569,59.335) K9.3@173.602,58.553 ; K9.3@173.841,57.708 ccw(c173.173,57.202) 173.173,58.04 ccw(c173.173,58.878) K9.3@173.841,58.372
  Bottom Layer w0.3: U8.14@146.768,46.309 ccw(c146.548,46.53) 146.86,46.53 ccw(c147.172,46.53) U8.14@146.951,46.309 ; U8.14@146.86,45.341 146.86,46.91 148.94,48.99 162.58,48.99 164.06,50.47 169.37,50.47 170.53,51.63 170.53,55.82 172.75,58.04 ; K9.3@173.557,57.591 ccw(c172.75,57.089) 172.75,58.04 ; K9.3@173.557,58.489 cw(c172.75,58.991) 172.75,58.04 ; K9.3@174.279,58.04 172.75,58.04
OUT_SIG5: D45.2 K11.3 U8.13 | length 48.9
  Top Layer w0.3: D45.2@165.549,52.67 ccw(c164.708,53.51) 165.897,53.51 ; D45.2@165.897,52.41 165.897,57.42 166.517,58.04 ; 165.897,53.486 ccw(c167.05,53.486) D45.2@166.234,52.67 ; K11.3@167.549,57.527 ccw(c166.517,56.745) 166.517,58.04 ; K11.3@167.549,58.553 cw(c166.517,59.335) 166.517,58.04 ; K11.3@167.788,57.708 ccw(c167.12,57.202) 167.12,58.04 ccw(c167.12,58.878) K11.3@167.788,58.372 ; K11.3@168.227,58.04 166.517,58.04
  Bottom Layer w0.3: U8.13@145.498,46.309 ccw(c145.278,46.53) 145.59,46.53 ccw(c145.902,46.53) U8.13@145.681,46.309 ; U8.13@145.59,45.341 145.59,46.94 148.24,49.59 162.32,49.59 164.48,51.75 164.48,55.93 166.59,58.04 ; K11.3@167.531,57.551 ccw(c166.59,56.89) 166.59,58.04 ; K11.3@167.531,58.529 cw(c166.59,59.19) 166.59,58.04 ; K11.3@167.777,57.724 ccw(c167.168,57.296) 167.168,58.04 ccw(c167.168,58.784) K11.3@167.777,58.356 ; K11.3@168.337,58.15 K11.3@168.227,58.04 166.59,58.04
OUT_SIG6: D47.2 K13.3 U8.12 | length 41.7
  Top Layer w0.3: D47.2@159.493,52.67 ccw(c158.647,53.517) 159.844,53.517 ; D47.2@159.844,52.41 159.844,57.42 160.464,58.04 ; 159.844,53.479 ccw(c160.988,53.479) D47.2@160.179,52.67 ; K13.3@161.496,57.527 ccw(c160.464,56.745) 160.464,58.04 ; K13.3@161.496,58.553 cw(c160.464,59.335) 160.464,58.04 ; K13.3@161.736,57.708 ccw(c161.068,57.202) 161.068,58.04 ccw(c161.068,58.878) K13.3@161.736,58.372 ; K13.3@162.174,58.04 160.464,58.04
  Bottom Layer w0.3: U8.12@144.228,46.309 ccw(c144.008,46.53) 144.32,46.53 ccw(c144.632,46.53) U8.12@144.411,46.309 ; U8.12@144.32,45.341 144.32,46.94 147.57,50.19 156.98,50.19 158.48,51.69 158.48,55.7 160.82,58.04 ; K13.3@161.408,57.671 ccw(c160.82,57.387) 160.82,58.04 ; K13.3@161.408,58.409 cw(c160.82,58.693) 160.82,58.04 ; K13.3@162.174,58.04 160.82,58.04
OUT_SIG7: D49.2 K15.3 U8.11 | length 38.9
  Top Layer w0.3: D49.2@153.438,52.67 ccw(c152.585,53.523) 153.791,53.523 ; D49.2@153.791,52.41 153.791,57.42 154.411,58.04 ; 153.791,53.473 ccw(c154.927,53.473) D49.2@154.124,52.67 ; K15.3@155.444,57.527 ccw(c154.411,56.745) 154.411,58.04 ; K15.3@155.444,58.553 cw(c154.411,59.335) 154.411,58.04 ; K15.3@155.683,57.708 ccw(c155.015,57.202) 155.015,58.04 ccw(c155.015,58.878) K15.3@155.683,58.372 ; K15.3@156.121,58.04 154.411,58.04
  Bottom Layer w0.3: U8.11@142.958,46.309 ccw(c142.738,46.53) 143.05,46.53 ccw(c143.362,46.53) U8.11@143.141,46.309 ; U8.11@143.05,45.341 143.05,46.99 146.85,50.79 151.3,50.79 152.37,51.86 152.37,55.87 154.54,58.04 ; K15.3@155.412,57.571 ccw(c154.54,56.994) 154.54,58.04 ; K15.3@155.412,58.509 cw(c154.54,59.086) 154.54,58.04 ; K15.3@155.663,57.737 ccw(c155.098,57.363) 155.098,58.04 ccw(c155.098,58.717) K15.3@155.663,58.343 ; K15.3@156.121,58.04 154.54,58.04
OUT_SIG8: D35.2 K2.3 U10.18 | length 45.5
  Top Layer w0.3: D35.2@147.383,52.67 ccw(c146.523,53.53) 147.739,53.53 ; D35.2@147.739,52.41 147.739,57.42 148.359,58.04 ; 147.739,53.466 ccw(c148.865,53.466) D35.2@148.068,52.67 ; K2.3@149.391,57.527 ccw(c148.359,56.745) 148.359,58.04 ; K2.3@149.391,58.553 cw(c148.359,59.335) 148.359,58.04 ; K2.3@149.63,57.708 ccw(c148.962,57.202) 148.962,58.04 ccw(c148.962,58.878) K2.3@149.63,58.372 ; K2.3@150.069,58.04 148.359,58.04
  Bottom Layer w0.3: U10.18@130.818,46.779 ccw(c130.598,47) 130.91,47 ccw(c131.222,47) U10.18@131.001,46.779 ; U10.18@130.91,45.811 130.91,47.19 131.34,47.62 138.75,47.62 139.86,48.73 143.84,48.73 146.32,51.21 146.32,55.98 148.38,58.04 ; K2.3@149.386,57.534 ccw(c148.38,56.788) 148.38,58.04 ; K2.3@149.386,58.546 cw(c148.38,59.292) 148.38,58.04 ; K2.3@149.627,57.712 ccw(c148.976,57.23) 148.976,58.04 ccw(c148.976,58.85) K2.3@149.627,58.368 ; K2.3@150.069,58.04 148.38,58.04
OUT_SIG9: D38.2 K4.3 U10.17 | length 45.6
  Top Layer w0.3: D38.2@141.327,52.67 ccw(c140.461,53.536) 141.686,53.536 ; D38.2@141.686,52.41 141.686,57.42 142.306,58.04 ; 141.686,53.46 ccw(c142.803,53.46) D38.2@142.013,52.67 ; K4.3@143.338,57.527 ccw(c142.306,56.745) 142.306,58.04 ; K4.3@143.338,58.553 cw(c142.306,59.335) 142.306,58.04 ; K4.3@143.578,57.708 ccw(c142.91,57.202) 142.91,58.04 ccw(c142.91,58.878) K4.3@143.578,58.372 ; K4.3@144.016,58.04 142.306,58.04
  Bottom Layer w0.3: U10.17@129.548,46.779 ccw(c129.328,47) 129.64,47 ccw(c129.952,47) U10.17@129.731,46.779 ; U10.17@129.64,45.811 129.64,47.3 130.56,48.22 138.46,48.22 139.57,49.33 143.59,49.33 145.72,51.46 145.72,57.29 144.97,58.04 K4.3@144.016,58.04 ; K4.3@143.999,58.087 cw(c144.383,57.011) 145.191,57.819 ; K4.3@144.1,57.805 cw(c144.56,56.517) 145.526,57.484 ; K4.3@144.201,57.522 cw(c144.736,56.023) 145.862,57.148
OUT_SIG10: D40.2 K6.3 U10.16 | length 40.5
  Top Layer w0.3: D40.2@135.272,52.67 ccw(c134.399,53.542) 135.633,53.542 ; D40.2@135.633,52.41 135.633,57.42 136.253,58.04 ; 135.633,53.453 ccw(c136.741,53.453) D40.2@135.958,52.67 ; K6.3@137.286,57.527 ccw(c136.253,56.745) 136.253,58.04 ; K6.3@137.286,58.553 cw(c136.253,59.335) 136.253,58.04 ; K6.3@137.525,57.708 ccw(c136.857,57.202) 136.857,58.04 ccw(c136.857,58.878) K6.3@137.525,58.372 ; K6.3@137.963,58.04 136.253,58.04
  Bottom Layer w0.3: U10.16@128.278,46.779 ccw(c128.058,47) 128.37,47 ccw(c128.682,47) U10.16@128.461,46.779 ; U10.16@128.37,45.811 128.37,47.92 129.27,48.82 138.16,48.82 139.71,50.37 139.71,57.37 139.04,58.04 K6.3@137.963,58.04 ; K6.3@137.945,58.087 cw(c138.395,56.929) 139.273,57.807 ; K6.3@138.054,57.807 cw(c138.577,56.461) 139.598,57.482
OUT_SIG11: D42.2 K8.3 U10.15 | length 37
  Top Layer w0.3: D42.2@129.217,52.67 ccw(c128.338,53.549) 129.581,53.549 ; D42.2@129.581,52.41 129.581,57.42 130.201,58.04 ; 129.581,53.447 ccw(c130.679,53.447) D42.2@129.902,52.67 ; K8.3@131.233,57.527 ccw(c130.201,56.745) 130.201,58.04 ; K8.3@131.233,58.553 cw(c130.201,59.335) 130.201,58.04 ; K8.3@131.472,57.708 ccw(c130.804,57.202) 130.804,58.04 ccw(c130.804,58.878) K8.3@131.472,58.372 ; K8.3@131.911,58.04 130.201,58.04
  Bottom Layer w0.3: U10.15@127.008,46.779 ccw(c126.788,47) 127.1,47 ccw(c127.412,47) U10.15@127.191,46.779 ; U10.15@127.1,45.811 127.1,48.35 128.17,49.42 132.35,49.42 133.65,50.72 133.65,57.4 133.01,58.04 K8.3@131.911,58.04 ; K8.3@131.78,58.365 cw(c132.173,57.389) 132.917,58.133 ; K8.3@131.892,58.086 cw(c132.358,56.932) 133.238,57.812 ; K8.3@132.004,57.808 cw(c132.542,56.475) 133.558,57.492
OUT_SIG12: D44.2 K10.3 U10.14 | length 32.5
  Top Layer w0.3: D44.2@123.161,52.67 ccw(c122.276,53.555) 123.528,53.555 ; D44.2@123.528,52.41 123.528,57.42 124.148,58.04 K10.3@125.858,58.04 ; 123.528,53.44 ccw(c124.618,53.44) D44.2@123.847,52.67 ; K10.3@125.18,57.527 ccw(c124.148,56.745) 124.148,58.04 ccw(c124.148,59.335) K10.3@125.18,58.553 ; K10.3@125.42,57.708 ccw(c124.752,57.202) 124.752,58.04 ccw(c124.752,58.878) K10.3@125.42,58.372
  Bottom Layer w0.3: U10.14@125.738,46.779 ccw(c125.518,47) 125.83,47 ccw(c126.142,47) U10.14@125.921,46.779 ; U10.14@125.83,45.811 125.83,48.66 127.62,50.45 127.62,57.09 126.67,58.04 K10.3@125.858,58.04 ; K10.3@125.845,58.088 cw(c126.125,57.01) 126.912,57.798 ; K10.3@125.921,57.798 cw(c126.277,56.42) 127.284,57.426 ; K10.3@125.996,57.508 cw(c126.43,55.83) 127.655,57.055
OUT_SIG13: D46.2 K12.3 U10.13 | length 34.3
  Top Layer w0.3: D46.2@117.106,52.67 ccw(c116.214,53.562) 117.475,53.562 ; D46.2@117.475,52.41 117.475,57.42 118.095,58.04 ; 117.475,53.434 ccw(c118.556,53.434) D46.2@117.792,52.67 ; K12.3@119.128,57.527 ccw(c118.095,56.745) 118.095,58.04 ; K12.3@119.128,58.553 cw(c118.095,59.335) 118.095,58.04 ; K12.3@119.367,57.708 ccw(c118.699,57.202) 118.699,58.04 ccw(c118.699,58.878) K12.3@119.367,58.372 ; K12.3@119.805,58.04 118.095,58.04
  Bottom Layer w0.3: K12.3@119.684,58.368 cw(c120.079,57.297) 120.886,58.104 ; K12.3@119.788,58.087 cw(c120.257,56.813) 121.217,57.773 ; K12.3@119.805,58.04 120.95,58.04 ; K12.3@119.892,57.805 cw(c120.435,56.328) 121.549,57.441 ; K12.3@120.619,57.794 cw(c120.95,57.694) 120.95,58.04 ; K12.3@120.619,58.286 ccw(c120.95,58.386) 120.95,58.04 ; U10.13@124.468,46.779 ccw(c124.248,47) 124.56,47 ccw(c124.872,47) U10.13@124.651,46.779 ; U10.13@124.56,45.811 124.56,48.7 121.64,51.62 121.64,57.35 120.95,58.04
OUT_SIG14: D48.2 K14.3 U10.12 | length 38.4
  Top Layer w0.3: D48.2@111.051,52.67 ccw(c110.152,53.568) 111.423,53.568 ; D48.2@111.423,52.41 111.423,57.42 112.043,58.04 ; 111.423,53.428 ccw(c112.494,53.428) D48.2@111.736,52.67 ; K14.3@113.075,57.527 ccw(c112.043,56.745) 112.043,58.04 ; K14.3@113.075,58.553 cw(c112.043,59.335) 112.043,58.04 ; K14.3@113.314,57.708 ccw(c112.646,57.202) 112.646,58.04 ccw(c112.646,58.878) K14.3@113.314,58.372 ; K14.3@113.753,58.04 112.043,58.04
  Bottom Layer w0.3: K14.3@113.74,58.088 cw(c114.04,56.936) 114.882,57.778 ; K14.3@113.753,58.04 114.62,58.04 115.56,57.1 115.56,50.78 116.52,49.82 122.01,49.82 123.29,48.54 U10.12@123.29,45.811 ; K14.3@113.816,57.798 cw(c114.193,56.348) 115.253,57.407 ; K14.3@113.891,57.508 cw(c114.346,55.76) 115.623,57.037 ; U10.12@123.198,46.779 ccw(c122.978,47) 123.29,47 ccw(c123.602,47) U10.12@123.381,46.779
OUT_SIG15: D50.2 K16.3 U10.11 | length 43.1
  Top Layer w0.3: D50.2@104.995,52.72 ccw(c104.091,53.625) 105.37,53.625 ; 105.37,53.471 ccw(c106.432,53.471) D50.2@105.681,52.72 ; D50.2@105.403,52.377 105.37,52.41 105.37,57.42 105.99,58.04 ; K16.3@107.022,57.527 ccw(c105.99,56.745) 105.99,58.04 ; K16.3@107.022,58.553 cw(c105.99,59.335) 105.99,58.04 ; K16.3@107.262,57.708 ccw(c106.594,57.202) 106.594,58.04 ccw(c106.594,58.878) K16.3@107.262,58.372 ; K16.3@107.7,58.04 105.99,58.04
  Bottom Layer w0.3: K16.3@107.686,58.088 cw(c108.014,56.976) 108.834,57.796 ; K16.3@107.7,58.04 108.59,58.04 109.46,57.17 109.46,50.59 110.83,49.22 120.84,49.22 122.02,48.04 U10.11@122.02,45.811 ; K16.3@107.771,57.8 cw(c108.177,56.425) 109.191,57.439 ; K16.3@107.856,57.513 cw(c108.34,55.874) 109.548,57.082 ; U10.11@121.928,46.779 ccw(c121.708,47) 122.02,47 ccw(c122.332,47) U10.11@122.111,46.779
PA0: U7.4 U8.1 | length 17.2
  Bottom Layer w0.3: U7.4@139.129,43.365 146.505,43.365 151.93,37.94 151.93,36.309 U8.1@151.94,36.299 ; U8.1@151.848,37.267 ccw(c151.652,37.463) 151.93,37.463 ; 151.93,37.512 ccw(c152.277,37.512) U8.1@152.031,37.267
PA1: U7.5 U8.2 | length 15.5
  Bottom Layer w0.3: U7.5@139.129,42.715 145.835,42.715 150.64,37.91 150.64,36.329 U8.2@150.67,36.299 ; 150.64,37.56 ccw(c151.055,37.56) U8.2@150.761,37.267
PA2: U7.6 U8.3 | length 13.9
  Bottom Layer w0.3: U7.6@139.129,42.065 145.215,42.065 149.38,37.9 149.38,36.319 U8.3@149.4,36.299 ; 149.38,37.536 ccw(c149.761,37.536) U8.3@149.491,37.267
PA3: U7.7 U8.4 | length 12.4
  Bottom Layer w0.3: U7.7@139.129,41.415 144.625,41.415 148.15,37.89 148.15,36.319 U8.4@148.13,36.299 ; U8.4@148.038,37.267 ccw(c147.769,37.536) 148.15,37.536
PA4: U7.8 U8.5 | length 11
  Bottom Layer w0.3: U7.8@139.129,40.765 143.955,40.765 146.86,37.86 U8.5@146.86,36.299 ; U8.5@146.768,37.267 ccw(c146.548,37.488) 146.86,37.488 ccw(c147.172,37.487) U8.5@146.951,37.267
PA5: U7.9 U8.6 | length 9.1
  Bottom Layer w0.3: U7.9@139.129,40.115 143.355,40.115 145.56,37.91 145.56,36.54 U8.6@145.54,36.52 ; 145.56,37.56 ccw(c145.975,37.56) U8.6@145.681,37.267
PA6: U7.10 U8.7 | length 7.9
  Bottom Layer w0.3: U7.10@139.129,39.465 142.725,39.465 144.31,37.88 144.31,36.309 U8.7@144.32,36.299 ; U8.7@144.228,37.267 ccw(c144.032,37.463) 144.31,37.463 ; 144.31,37.512 ccw(c144.657,37.512) U8.7@144.411,37.267
PA7: U7.11 U8.8 | length 6.2
  Bottom Layer w0.3: U7.11@139.129,38.815 142.055,38.815 143.09,37.78 143.09,36.339 U8.8@143.05,36.299 ; U8.8@142.958,37.267 ccw(c142.641,37.584) 143.09,37.584
PB0: U7.13 U10.1 | length 4.2
  Bottom Layer w0.3: U10.1@130.91,36.769 130.91,37.46 131.615,38.165 U7.13@133.491,38.165 ; U10.1@130.91,37.774 ccw(c130.91,38.534) 131.447,37.997
PB1: U7.14 U10.2 | length 6
  Bottom Layer w0.3: U10.2@129.548,37.737 ccw(c129.328,37.957) 129.64,37.957 ccw(c129.952,37.957) U10.2@129.731,37.737 ; U10.2@129.64,36.769 129.64,38.09 130.365,38.815 U7.14@133.491,38.815
PB2: U7.15 U10.3 | length 7.5
  Bottom Layer w0.3: U10.3@128.278,37.737 ccw(c128.058,37.957) 128.37,37.957 ccw(c128.682,37.957) U10.3@128.461,37.737 ; U10.3@128.37,36.769 128.37,38.12 129.715,39.465 U7.15@133.491,39.465
PB3: U7.16 U10.4 | length 9.1
  Bottom Layer w0.3: U10.4@127.008,37.737 ccw(c126.788,37.957) 127.1,37.957 ccw(c127.412,37.957) U10.4@127.191,37.737 ; U10.4@127.1,36.769 127.1,38.25 128.965,40.115 U7.16@133.491,40.115
PB4: U7.17 U10.5 | length 10.7
  Bottom Layer w0.3: U10.5@125.738,37.737 ccw(c125.518,37.957) 125.83,37.957 ccw(c126.142,37.957) U10.5@125.921,37.737 ; U10.5@125.83,36.769 125.83,38.28 128.315,40.765 U7.17@133.491,40.765
PB5: U7.18 U10.6 | length 12.3
  Bottom Layer w0.3: U10.6@124.468,37.737 ccw(c124.248,37.957) 124.56,37.957 ccw(c124.872,37.957) U10.6@124.651,37.737 ; U10.6@124.56,36.769 124.56,38.32 127.655,41.415 U7.18@133.491,41.415
PB6: U7.19 U10.7 | length 13.9
  Bottom Layer w0.3: U10.7@123.198,37.737 ccw(c122.978,37.957) 123.29,37.957 ccw(c123.602,37.957) U10.7@123.381,37.737 ; U10.7@123.29,36.769 123.29,38.45 126.905,42.065 U7.19@133.491,42.065
PB7: U7.20 U10.8 | length 15.4
  Bottom Layer w0.3: U10.8@121.928,37.737 ccw(c121.708,37.957) 122.02,37.957 ccw(c122.332,37.957) U10.8@122.111,37.737 ; U10.8@122.02,36.769 122.02,38.44 126.295,42.715 U7.20@133.491,42.715
PWM_TIM1_CH3: U14.16
PWR_BUT: P1.9
SCLK_AO: ISO1.13 U15.8 U16.8 | length 33.4
  Top Layer w0.3: v1@62.145,43.805 cw(c62.8,43.805) 62.337,44.268 ; ISO1.13@62.189,42.446 ccw(c61.933,42.702) 62.295,42.702 ccw(c62.657,42.702) ISO1.13@62.401,42.446 ; v1@62.189,43.699 cw(c61.933,43.443) 62.295,43.443 cw(c62.657,43.443) v1@62.401,43.699 ; v1@62.189,43.911 ccw(c61.933,44.167) 62.295,44.167 ccw(c62.657,44.167) v1@62.401,43.911 ; ISO1.13@62.295,41.49 62.295,44.226 63.013,44.944 ; v1@62.445,43.805 cw(c63.825,43.805) 62.849,44.781 ; 63.013,45.023 U16.8@63.013,47.464 ; v1@80.354,44.306 ccw(c80.074,44.586) 80.47,44.586 ; v1@80.47,44.2 80.47,45.46 80.763,45.753 U15.8@80.763,47.464 ; 80.47,44.538 ccw(c80.798,44.538) v1@80.566,44.306
  Bottom Layer w0.3: v1@62.295,43.655 cw(c62.295,43.293) 62.551,43.549 cw(c62.807,43.805) v1@62.445,43.805 ; v1(62.295,43.805) 62.89,43.21 79.48,43.21 v1@80.465,44.195 ; 80.197,43.927 ccw(c79.924,44.2) v1@80.31,44.2 ; 80.221,43.951 cw(c80.46,43.712) v1@80.46,44.05
  other v1: 80.46,44.2
SCLK_DIG: ISO1.4 P1.22 U1.5 | length 40.5
  Top Layer w0.3: ISO1.4@62.189,31.434 cw(c61.933,31.178) 62.295,31.178 cw(c62.657,31.178) ISO1.4@62.401,31.434 ; ISO1.4@62.295,32.39 62.295,30.735 63.08,29.95 64.42,29.95 64.84,29.53 64.84,24.86 65.8,23.9 69.52,23.9 71.275,25.655 69.97,26.96 69.97,35.54 71.005,36.575 U1.5@76.07,36.575 ; 70.021,24.401 ccw(c68.673,25.75) 70.58,25.75 ccw(c69.131,25.75) 70.156,26.774 ccw(c71.18,27.799) P1.22@71.18,26.35 ; 70.48,24.86 cw(c71.18,24.16) P1.22@71.18,25.15 ; 70.534,24.914 ccw(c69.697,25.75) P1.22@70.88,25.75 ; U1.5@75.114,36.469 ccw(c74.858,36.213) 74.858,36.575 ccw(c74.858,36.937) U1.5@75.114,36.681
SDI2: R131.1 U16.9 | length 13.7
  Top Layer w0.3: 63.663,45.421 ccw(c64.561,45.421) v1@63.926,44.786 ; U16.9@63.663,47.464 63.663,44.837 v1(63.82,44.68)
  Bottom Layer w0.3: v1@63.926,44.574 cw(c64.182,44.318) 64.182,44.68 cw(c64.182,45.042) v1@63.926,44.786 ; 64.264,44.68 ccw(c64.264,46.035) R131.1@65.521,45.529 ; 64.708,44.68 ccw(c64.708,45.856) R131.1@65.8,45.417 ; 65.153,44.68 ccw(c65.153,45.678) R131.1@66.078,45.305 ; R131.1@65.234,45.304 cw(c64.719,45.128) 65.104,44.744 cw(c65.663,44.184) R131.1@65.682,44.975 ; R131.1@65.243,45.641 cw(c63.82,46.214) v1(63.82,44.68) 65.04,44.68 R131.1@65.82,45.46
SDO1: R131.2 U15.10 | length 20.3
  Top Layer w0.3: 82.063,46.385 ccw(c83.165,46.385) v1@82.386,45.606 ; U15.10@82.063,47.464 82.063,45.717 v1(82.28,45.5)
  Bottom Layer w0.3: R131.2@68.106,45.46 69.156,44.41 77.91,44.41 79.17,45.67 82.03,45.67 ; R131.2@68.233,44.975 cw(c68.233,44.111) 68.844,44.722 ; R131.2@68.718,45.439 ccw(c70.001,45.382) 69.092,44.474 ; 81.507,45.67 cw(c81.507,44.727) v1@82.174,45.394
SPI0_CS0: P1.17 U1.4 U2.2 | length 32.8
  Top Layer w0.3: U2.2@72.708,30.828 cw(c72.488,30.607) 72.8,30.607 cw(c73.112,30.607) U2.2@72.891,30.828 ; U2.2@72.8,31.376 72.8,30.3 72.92,30.18 75.01,30.18 76.22,31.39 78.06,31.39 78.06,37.36 77.575,37.845 U1.4@76.07,37.845 ; U1.4@77.026,37.739 cw(c77.282,37.483) 77.282,37.845 cw(c77.282,38.207) U1.4@77.026,37.951 ; v1@77.964,31.284 ccw(c77.708,31.028) 77.708,31.39 ccw(c77.708,31.752) 77.964,31.496 ccw(c77.732,31.728) 78.06,31.728 ; 78.06,31.776 ccw(c78.456,31.776) v1@78.176,31.496
  MidLayer2 w0.3: P1.17@66.1,28.29 67.79,29.98 76.657,29.98 v1@78.076,31.399 ; P1.17@66.1,28.89 ccw(c66.1,30.339) 67.124,29.314 ccw(c68.149,28.29) P1.17@66.7,28.29
  other v1: 78.07,31.39
SPI1_CS0: P1.28
SPI1_CS1: P1.42
SPI1_D0: P1.29
SPI1_D1: P1.30
SPI1_SCLK: P1.31
SYS_5V: P1.7 P1.8 | length 2.5
  Top Layer w0.3: P1.8@53.4,25.75 P1.7@53.4,28.29
SYS_RESETN: P1.10
UART1_RXD: P1.26 P5.4 | length 175.8
  Top Layer w0.3: P1.26@76.26,25.75 77.55,27.04 77.55,29.43 78.09,29.97 81.65,29.97 83.01,31.33 83.01,42.271 83.609,42.87 87.79,42.87 90.43,45.51 90.43,59.98 93.28,62.83 102.53,62.83 102.95,63.25 v1(102.95,64.95) ; P1.26@76.26,26.35 ccw(c76.26,27.799) 77.284,26.774 ccw(c78.309,25.75) P1.26@76.86,25.75 ; v1@102.844,64.844 cw(c102.588,64.588) 102.95,64.588 cw(c103.312,64.588) v1@103.056,64.844
  Bottom Layer w0.3: v1(102.95,64.95) 103.4,65.4 151.82,65.4 152.79,66.37 152.79,70.11 153.75,71.07 200.03,71.07 200.59,71.63 205.53,71.63 206.65,72.75 P5.4@206.65,72.9 ; v1@102.95,65.1 ccw(c102.95,65.462) 103.206,65.206 ccw(c103.462,64.95) v1@103.1,64.95 ; 205.605,71.705 ccw(c204.524,72.787) P5.4@206.051,72.868 ; 205.882,71.982 cw(c206.65,71.214) P5.4@206.65,72.3 ; 206.081,72.181 ccw(c205.427,72.835) P5.4@206.35,72.884
UART1_TXD: P1.24 P5.3 | length 177.4
  Top Layer w0.3: P1.24@73.72,25.75 75,27.03 75,29.07 76.5,30.57 81.4,30.57 82.41,31.58 82.41,42.52 83.37,43.48 87.547,43.48 89.83,45.763 89.83,60.23 93.4,63.8 v1(101.97,63.8) ; P1.24@73.72,26.35 ccw(c73.72,27.799) 74.744,26.774 ccw(c75.769,25.75) P1.24@74.32,25.75 ; v1@101.864,63.694 ccw(c101.608,63.438) 101.608,63.8 ccw(c101.608,64.162) v1@101.864,63.906
  Bottom Layer w0.3: v1(101.97,63.8) 103.08,63.8 104.06,64.78 152.2,64.78 153.41,65.99 153.41,69.64 154.24,70.47 199.74,70.47 201.93,68.28 205.84,68.28 206.65,69.09 ; v1@102.076,63.694 cw(c102.332,63.438) 102.332,63.8 cw(c102.332,64.162) v1@102.076,63.906 ; P5.3@206.269,69.897 cw(c205.606,69.09) 206.65,69.09 ; P5.3@206.65,70.36 206.65,69.09 ; P5.3@207.031,69.897 ccw(c207.694,69.09) 206.65,69.09
UART4_RXD: P1.11 P7.5 | length 198.6
  Top Layer w0.3: P1.11@58.48,27.69 cw(c58.48,26.241) 59.504,27.266 cw(c60.529,28.29) P1.11@59.08,28.29 ; P1.11@58.48,28.29 59.8,26.97 59.8,9.578 67.067,2.311 203.259,2.311 v1(204,1.57) ; v1@203.85,1.57 ccw(c203.488,1.57) 203.744,1.826 ccw(c204,2.082) v1@204,1.72
  Bottom Layer w0.3: 203.89,2.198 ccw(c204.628,2.198) v1@204.106,1.676 ; v1(204,1.57) 203.89,1.68 203.89,4.22 205.302,5.632 221.602,5.632 222.81,6.84 P7.5@222.81,10.22 ; P7.5@222.386,9.796 cw(c221.361,8.771) 222.81,8.771 cw(c224.259,8.771) P7.5@223.234,9.796
UART4_TXD: P1.13 P7.6 | length 197.4
  Top Layer w0.3: P1.13@61.02,27.69 cw(c61.02,26.241) 62.044,27.266 cw(c63.069,28.29) P1.13@61.62,28.29 ; P1.13@61.02,28.29 62.29,27.02 62.29,9.153 68.318,3.125 204.275,3.125 v1(204.69,2.71)
  Bottom Layer w0.3: v1@204.584,2.816 ccw(c204.328,3.072) 204.69,3.072 ccw(c205.052,3.072) v1@204.796,2.816 ; v1(204.69,2.71) 204.69,4.15 205.57,5.03 224.06,5.03 225.33,6.3 225.33,10.2 P7.6@225.35,10.22 ; P7.6@224.926,9.796 cw(c223.95,8.82) 225.33,8.82 ; 225.33,8.723 cw(c226.847,8.723) P7.6@225.774,9.796 ; 225.33,9.447 cw(c226.123,9.447) P7.6@225.562,10.008